# Altium PCB PcbPanel.PcbDoc
Units mm, origin at the board's own origin, x right, y up, seen from the top; angles counter-clockwise.
Board outline 198 x 105.6 mm, 2 copper layers (Top Layer, Bottom Layer), stack 1.092 mm thick; 6 components, 178 nets, 10 pads, 0 vias.
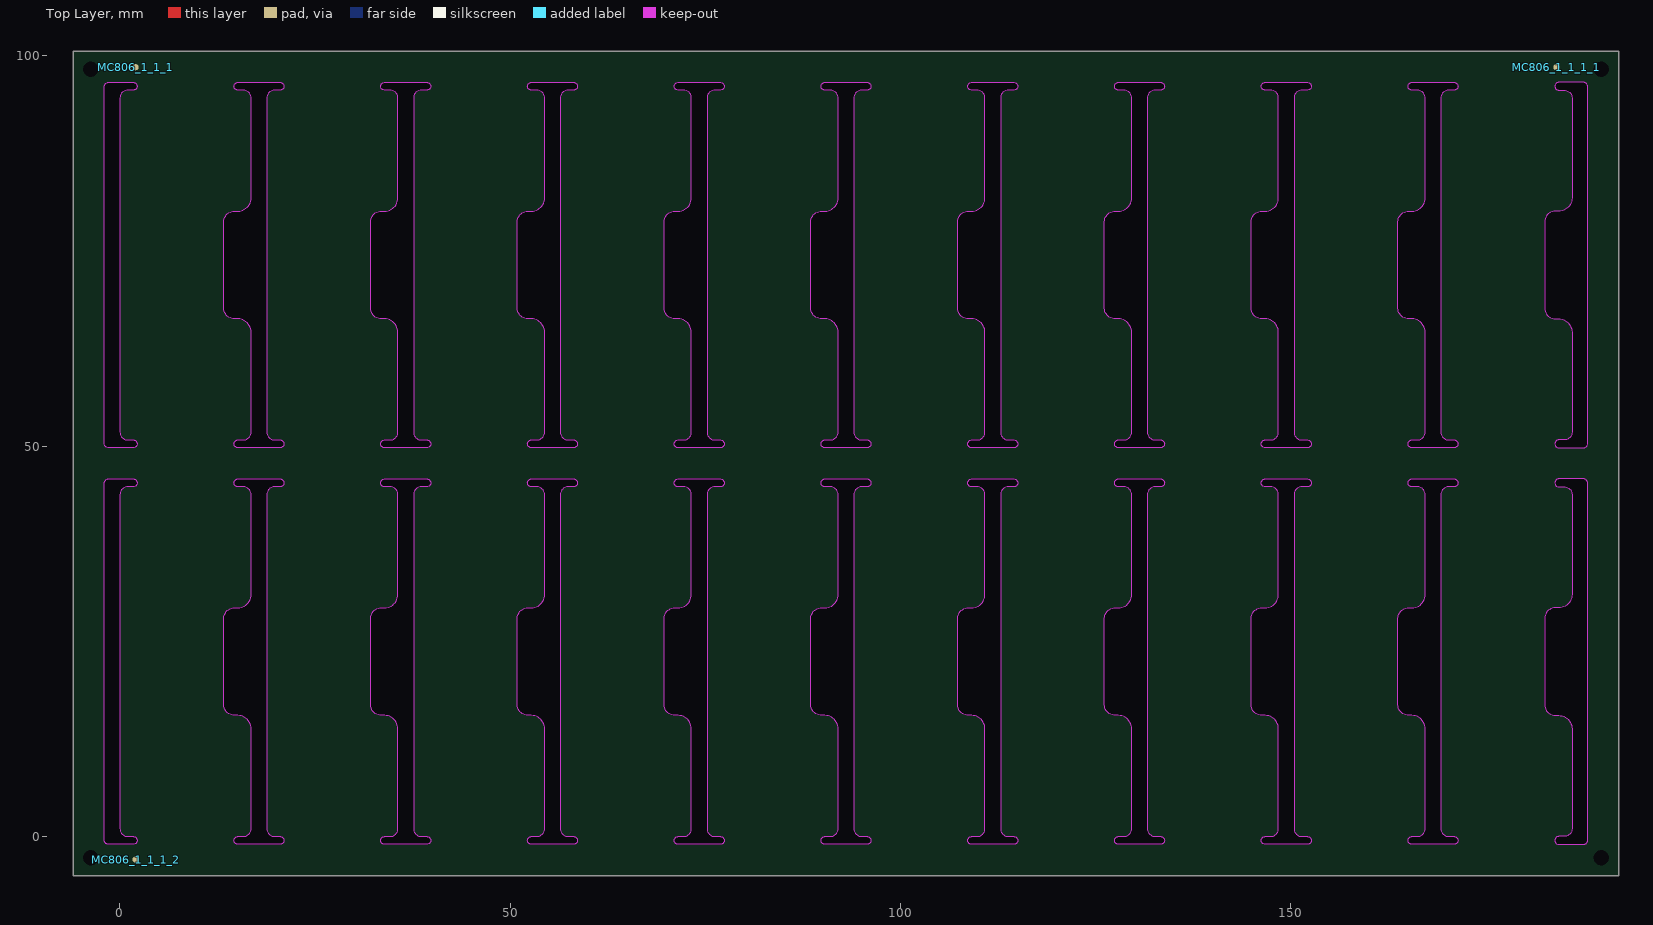
[diagram p0: Top Layer view]
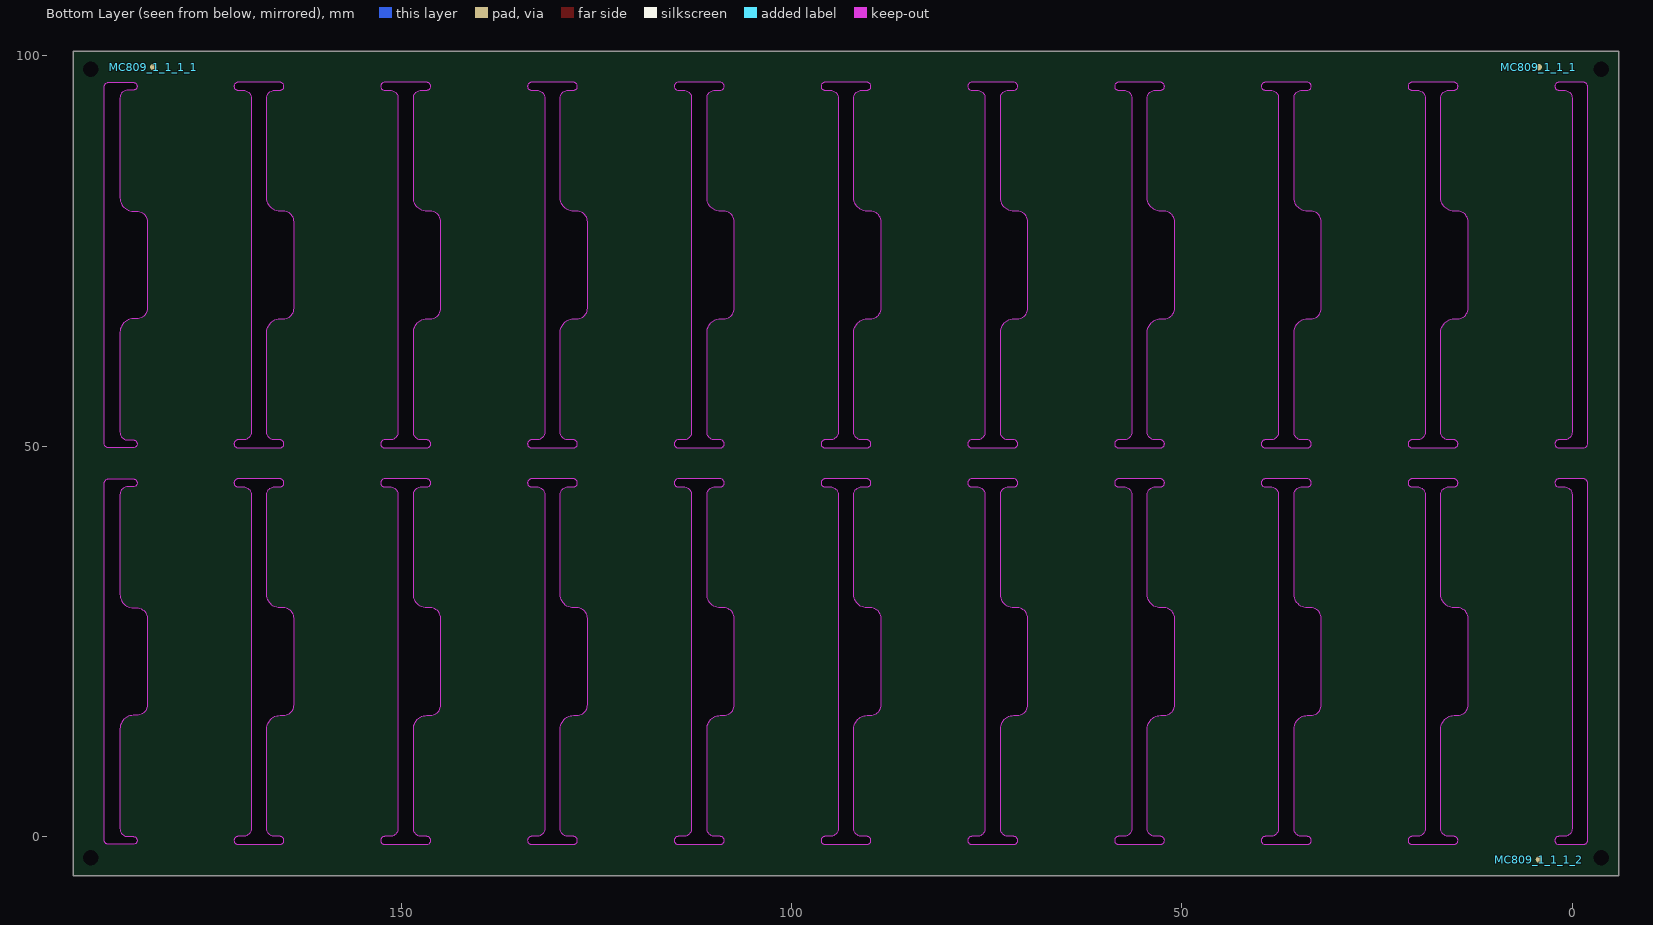
[diagram p1: Bottom Layer view, seen from below]

## Layer stack, top to bottom
Top Solder: solder mask 0.0102, SM-001, Dk 4
Top Layer: signal copper 0.0356
Dielectric 1: prepreg 0.2104, PP-017, Dk 4.3
Dielectric 3: core 0.6, Core-039, Dk 4.8
Dielectric 5: prepreg 0.2104, PP-017, Dk 4.3
Bottom Layer: signal copper 0.0356
Bottom Solder: solder mask 0.0102, SM-001, Dk 4

## Board outline
-6,-5 -6,100.6 192,100.6 192,-5
cut-out: 127.4,50.3 cw(c127.9,50.3) 127.9,50.8 128.6,50.8 ccw(c128.6,51.8) 129.6,51.8 129.6,64.6 ccw(c127.892,64.6) 127.892,66.308 127.464,66.308 cw(c127.464,67.67) 126.101,67.67 126.1,67.67 126.101,78.73 cw(c127.464,78.73) 127.464,80.092 127.892,80.092 ccw(c127.892,81.8) 129.6,81.8 129.6,94.6 ccw(c128.6,94.6) 128.6,95.6 127.9,95.6 cw(c127.9,96.1) 127.4,96.1 cw(c127.9,96.1) 127.9,96.6 133.3,96.6 cw(c133.3,96.1) 133.8,96.1 cw(c133.3,96.1) 133.3,95.6 132.6,95.6 ccw(c132.6,94.6) 131.6,94.6 131.6,51.8 ccw(c132.6,51.8) 132.6,50.8 133.3,50.8 cw(c133.3,50.3) 133.8,50.3 cw(c133.3,50.3) 133.3,49.8 127.9,49.8 cw(c127.9,50.3)
cut-out: 108.6,50.3 cw(c109.1,50.3) 109.1,50.8 109.8,50.8 ccw(c109.8,51.8) 110.8,51.8 110.8,64.6 ccw(c109.092,64.6) 109.092,66.308 108.664,66.308 cw(c108.664,67.67) 107.301,67.67 107.3,67.67 107.301,78.73 cw(c108.664,78.73) 108.664,80.092 109.092,80.092 ccw(c109.092,81.8) 110.8,81.8 110.8,94.6 ccw(c109.8,94.6) 109.8,95.6 109.1,95.6 cw(c109.1,96.1) 108.6,96.1 cw(c109.1,96.1) 109.1,96.6 114.5,96.6 cw(c114.5,96.1) 115,96.1 cw(c114.5,96.1) 114.5,95.6 113.8,95.6 ccw(c113.8,94.6) 112.8,94.6 112.8,51.8 ccw(c113.8,51.8) 113.8,50.8 114.5,50.8 cw(c114.5,50.3) 115,50.3 cw(c114.5,50.3) 114.5,49.8 109.1,49.8 cw(c109.1,50.3)
cut-out: 89.8,50.3 cw(c90.3,50.3) 90.3,50.8 91,50.8 ccw(c91,51.8) 92,51.8 92,64.6 ccw(c90.292,64.6) 90.292,66.308 89.864,66.308 cw(c89.864,67.67) 88.501,67.67 88.5,67.67 88.501,78.73 cw(c89.864,78.73) 89.864,80.092 90.292,80.092 ccw(c90.292,81.8) 92,81.8 92,94.6 ccw(c91,94.6) 91,95.6 90.3,95.6 cw(c90.3,96.1) 89.8,96.1 cw(c90.3,96.1) 90.3,96.6 95.7,96.6 cw(c95.7,96.1) 96.2,96.1 cw(c95.7,96.1) 95.7,95.6 95,95.6 ccw(c95,94.6) 94,94.6 94,51.8 ccw(c95,51.8) 95,50.8 95.7,50.8 cw(c95.7,50.3) 96.2,50.3 cw(c95.7,50.3) 95.7,49.8 90.3,49.8 cw(c90.3,50.3)
cut-out: 183.864,66.308 184.292,66.308 cw(c184.292,64.6) 186,64.6 186,51.8 cw(c185,51.8) 185,50.8 184.3,50.8 ccw(c184.3,50.3) 183.8,50.3 ccw(c184.3,50.3) 184.3,49.8 187.5,49.8 ccw(c187.5,50.3) 188,50.3 188,96.1 ccw(c187.5,96.1) 187.5,96.6 184.3,96.6 ccw(c184.3,96.1) 183.8,96.1 ccw(c184.3,96.1) 184.3,95.6 185,95.6 cw(c185,94.6) 186,94.6 186,81.8 cw(c184.292,81.8) 184.292,80.092 183.864,80.092 ccw(c183.864,78.73) 182.501,78.73 182.5,67.67 182.501,67.67 ccw(c183.864,67.67)
cut-out: 71,50.3 cw(c71.5,50.3) 71.5,50.8 72.2,50.8 ccw(c72.2,51.8) 73.2,51.8 73.2,64.6 ccw(c71.492,64.6) 71.492,66.308 71.064,66.308 cw(c71.064,67.67) 69.701,67.67 69.7,67.67 69.701,78.73 cw(c71.064,78.73) 71.064,80.092 71.492,80.092 ccw(c71.492,81.8) 73.2,81.8 73.2,94.6 ccw(c72.2,94.6) 72.2,95.6 71.5,95.6 cw(c71.5,96.1) 71,96.1 cw(c71.5,96.1) 71.5,96.6 76.9,96.6 cw(c76.9,96.1) 77.4,96.1 cw(c76.9,96.1) 76.9,95.6 76.2,95.6 ccw(c76.2,94.6) 75.2,94.6 75.2,51.8 ccw(c76.2,51.8) 76.2,50.8 76.9,50.8 cw(c76.9,50.3) 77.4,50.3 cw(c76.9,50.3) 76.9,49.8 71.5,49.8 cw(c71.5,50.3)
cut-out: 52.2,50.3 cw(c52.7,50.3) 52.7,50.8 53.4,50.8 ccw(c53.4,51.8) 54.4,51.8 54.4,64.6 ccw(c52.692,64.6) 52.692,66.308 52.264,66.308 cw(c52.264,67.67) 50.901,67.67 50.9,67.67 50.901,78.73 cw(c52.264,78.73) 52.264,80.092 52.692,80.092 ccw(c52.692,81.8) 54.4,81.8 54.4,94.6 ccw(c53.4,94.6) 53.4,95.6 52.7,95.6 cw(c52.7,96.1) 52.2,96.1 cw(c52.7,96.1) 52.7,96.6 58.1,96.6 cw(c58.1,96.1) 58.6,96.1 cw(c58.1,96.1) 58.1,95.6 57.4,95.6 ccw(c57.4,94.6) 56.4,94.6 56.4,51.8 ccw(c57.4,51.8) 57.4,50.8 58.1,50.8 cw(c58.1,50.3) 58.6,50.3 cw(c58.1,50.3) 58.1,49.8 52.7,49.8 cw(c52.7,50.3)
cut-out: 14.6,50.3 cw(c15.1,50.3) 15.1,50.8 15.8,50.8 ccw(c15.8,51.8) 16.8,51.8 16.8,64.6 ccw(c15.092,64.6) 15.092,66.308 14.664,66.308 cw(c14.664,67.67) 13.301,67.67 13.3,67.67 13.301,78.73 cw(c14.664,78.73) 14.664,80.092 15.092,80.092 ccw(c15.092,81.8) 16.8,81.8 16.8,94.6 ccw(c15.8,94.6) 15.8,95.6 15.1,95.6 cw(c15.1,96.1) 14.6,96.1 cw(c15.1,96.1) 15.1,96.6 20.5,96.6 cw(c20.5,96.1) 21,96.1 cw(c20.5,96.1) 20.5,95.6 19.8,95.6 ccw(c19.8,94.6) 18.8,94.6 18.8,51.8 ccw(c19.8,51.8) 19.8,50.8 20.5,50.8 cw(c20.5,50.3) 21,50.3 cw(c20.5,50.3) 20.5,49.8 15.1,49.8 cw(c15.1,50.3)
cut-out: 33.4,50.3 cw(c33.9,50.3) 33.9,50.8 34.6,50.8 ccw(c34.6,51.8) 35.6,51.8 35.6,64.6 ccw(c33.892,64.6) 33.892,66.308 33.464,66.308 cw(c33.464,67.67) 32.101,67.67 32.1,67.67 32.101,78.73 cw(c33.464,78.73) 33.464,80.092 33.892,80.092 ccw(c33.892,81.8) 35.6,81.8 35.6,94.6 ccw(c34.6,94.6) 34.6,95.6 33.9,95.6 cw(c33.9,96.1) 33.4,96.1 cw(c33.9,96.1) 33.9,96.6 39.3,96.6 cw(c39.3,96.1) 39.8,96.1 cw(c39.3,96.1) 39.3,95.6 38.6,95.6 ccw(c38.6,94.6) 37.6,94.6 37.6,51.8 ccw(c38.6,51.8) 38.6,50.8 39.3,50.8 cw(c39.3,50.3) 39.8,50.3 cw(c39.3,50.3) 39.3,49.8 33.9,49.8 cw(c33.9,50.3)
cut-out: 165,50.3 cw(c165.5,50.3) 165.5,50.8 166.2,50.8 ccw(c166.2,51.8) 167.2,51.8 167.2,64.6 ccw(c165.492,64.6) 165.492,66.308 165.064,66.308 cw(c165.064,67.67) 163.701,67.67 163.7,67.67 163.701,78.73 cw(c165.064,78.73) 165.064,80.092 165.492,80.092 ccw(c165.492,81.8) 167.2,81.8 167.2,94.6 ccw(c166.2,94.6) 166.2,95.6 165.5,95.6 cw(c165.5,96.1) 165,96.1 cw(c165.5,96.1) 165.5,96.6 170.9,96.6 cw(c170.9,96.1) 171.4,96.1 cw(c170.9,96.1) 170.9,95.6 170.2,95.6 ccw(c170.2,94.6) 169.2,94.6 169.2,51.8 ccw(c170.2,51.8) 170.2,50.8 170.9,50.8 cw(c170.9,50.3) 171.4,50.3 cw(c170.9,50.3) 170.9,49.8 165.5,49.8 cw(c165.5,50.3)
cut-out: 146.2,50.3 cw(c146.7,50.3) 146.7,50.8 147.4,50.8 ccw(c147.4,51.8) 148.4,51.8 148.4,64.6 ccw(c146.692,64.6) 146.692,66.308 146.264,66.308 cw(c146.264,67.67) 144.901,67.67 144.9,67.67 144.901,78.73 cw(c146.264,78.73) 146.264,80.092 146.692,80.092 ccw(c146.692,81.8) 148.4,81.8 148.4,94.6 ccw(c147.4,94.6) 147.4,95.6 146.7,95.6 cw(c146.7,96.1) 146.2,96.1 cw(c146.7,96.1) 146.7,96.6 152.1,96.6 cw(c152.1,96.1) 152.6,96.1 cw(c152.1,96.1) 152.1,95.6 151.4,95.6 ccw(c151.4,94.6) 150.4,94.6 150.4,51.8 ccw(c151.4,51.8) 151.4,50.8 152.1,50.8 cw(c152.1,50.3) 152.6,50.3 cw(c152.1,50.3) 152.1,49.8 146.7,49.8 cw(c146.7,50.3)
cut-out: -2,50.3 -2,96.1 cw(c-1.5,96.1) -1.5,96.6 1.7,96.6 cw(c1.7,96.1) 2.2,96.1 cw(c1.7,96.1) 1.7,95.6 1,95.6 ccw(c1,94.6) 0,94.6 0,51.8 ccw(c1,51.8) 1,50.8 1.7,50.8 cw(c1.7,50.3) 2.2,50.3 cw(c1.7,50.3) 1.7,49.8 -1.5,49.8 cw(c-1.5,50.3)
cut-out: 183.864,15.508 184.292,15.508 cw(c184.292,13.8) 186,13.8 186,1 cw(c185,1) 185,0 184.3,0 ccw(c184.3,-0.5) 183.8,-0.5 ccw(c184.3,-0.5) 184.3,-1 187.5,-1 ccw(c187.5,-0.5) 188,-0.5 188,45.3 ccw(c187.5,45.3) 187.5,45.8 184.3,45.8 ccw(c184.3,45.3) 183.8,45.3 ccw(c184.3,45.3) 184.3,44.8 185,44.8 cw(c185,43.8) 186,43.8 186,31 cw(c184.292,31) 184.292,29.292 183.864,29.292 ccw(c183.864,27.93) 182.501,27.93 182.5,16.87 182.501,16.87 ccw(c183.864,16.87)
cut-out: 165,-0.5 cw(c165.5,-0.5) 165.5,0 166.2,0 ccw(c166.2,1) 167.2,1 167.2,13.8 ccw(c165.492,13.8) 165.492,15.508 165.064,15.508 cw(c165.064,16.87) 163.701,16.87 163.7,16.87 163.701,27.93 cw(c165.064,27.93) 165.064,29.292 165.492,29.292 ccw(c165.492,31) 167.2,31 167.2,43.8 ccw(c166.2,43.8) 166.2,44.8 165.5,44.8 cw(c165.5,45.3) 165,45.3 cw(c165.5,45.3) 165.5,45.8 170.9,45.8 cw(c170.9,45.3) 171.4,45.3 cw(c170.9,45.3) 170.9,44.8 170.2,44.8 ccw(c170.2,43.8) 169.2,43.8 169.2,1 ccw(c170.2,1) 170.2,0 170.9,0 cw(c170.9,-0.5) 171.4,-0.5 cw(c170.9,-0.5) 170.9,-1 165.5,-1 cw(c165.5,-0.5)
cut-out: 146.2,-0.5 cw(c146.7,-0.5) 146.7,0 147.4,0 ccw(c147.4,1) 148.4,1 148.4,13.8 ccw(c146.692,13.8) 146.692,15.508 146.264,15.508 cw(c146.264,16.87) 144.901,16.87 144.9,16.87 144.901,27.93 cw(c146.264,27.93) 146.264,29.292 146.692,29.292 ccw(c146.692,31) 148.4,31 148.4,43.8 ccw(c147.4,43.8) 147.4,44.8 146.7,44.8 cw(c146.7,45.3) 146.2,45.3 cw(c146.7,45.3) 146.7,45.8 152.1,45.8 cw(c152.1,45.3) 152.6,45.3 cw(c152.1,45.3) 152.1,44.8 151.4,44.8 ccw(c151.4,43.8) 150.4,43.8 150.4,1 ccw(c151.4,1) 151.4,0 152.1,0 cw(c152.1,-0.5) 152.6,-0.5 cw(c152.1,-0.5) 152.1,-1 146.7,-1 cw(c146.7,-0.5)
cut-out: 127.4,-0.5 cw(c127.9,-0.5) 127.9,0 128.6,0 ccw(c128.6,1) 129.6,1 129.6,13.8 ccw(c127.892,13.8) 127.892,15.508 127.464,15.508 cw(c127.464,16.87) 126.101,16.87 126.1,16.87 126.101,27.93 cw(c127.464,27.93) 127.464,29.292 127.892,29.292 ccw(c127.892,31) 129.6,31 129.6,43.8 ccw(c128.6,43.8) 128.6,44.8 127.9,44.8 cw(c127.9,45.3) 127.4,45.3 cw(c127.9,45.3) 127.9,45.8 133.3,45.8 cw(c133.3,45.3) 133.8,45.3 cw(c133.3,45.3) 133.3,44.8 132.6,44.8 ccw(c132.6,43.8) 131.6,43.8 131.6,1 ccw(c132.6,1) 132.6,0 133.3,0 cw(c133.3,-0.5) 133.8,-0.5 cw(c133.3,-0.5) 133.3,-1 127.9,-1 cw(c127.9,-0.5)
cut-out: 108.6,-0.5 cw(c109.1,-0.5) 109.1,0 109.8,0 ccw(c109.8,1) 110.8,1 110.8,13.8 ccw(c109.092,13.8) 109.092,15.508 108.664,15.508 cw(c108.664,16.87) 107.301,16.87 107.3,16.87 107.301,27.93 cw(c108.664,27.93) 108.664,29.292 109.092,29.292 ccw(c109.092,31) 110.8,31 110.8,43.8 ccw(c109.8,43.8) 109.8,44.8 109.1,44.8 cw(c109.1,45.3) 108.6,45.3 cw(c109.1,45.3) 109.1,45.8 114.5,45.8 cw(c114.5,45.3) 115,45.3 cw(c114.5,45.3) 114.5,44.8 113.8,44.8 ccw(c113.8,43.8) 112.8,43.8 112.8,1 ccw(c113.8,1) 113.8,0 114.5,0 cw(c114.5,-0.5) 115,-0.5 cw(c114.5,-0.5) 114.5,-1 109.1,-1 cw(c109.1,-0.5)
cut-out: 89.8,-0.5 cw(c90.3,-0.5) 90.3,0 91,0 ccw(c91,1) 92,1 92,13.8 ccw(c90.292,13.8) 90.292,15.508 89.864,15.508 cw(c89.864,16.87) 88.501,16.87 88.5,16.87 88.501,27.93 cw(c89.864,27.93) 89.864,29.292 90.292,29.292 ccw(c90.292,31) 92,31 92,43.8 ccw(c91,43.8) 91,44.8 90.3,44.8 cw(c90.3,45.3) 89.8,45.3 cw(c90.3,45.3) 90.3,45.8 95.7,45.8 cw(c95.7,45.3) 96.2,45.3 cw(c95.7,45.3) 95.7,44.8 95,44.8 ccw(c95,43.8) 94,43.8 94,1 ccw(c95,1) 95,0 95.7,0 cw(c95.7,-0.5) 96.2,-0.5 cw(c95.7,-0.5) 95.7,-1 90.3,-1 cw(c90.3,-0.5)
cut-out: 71,-0.5 cw(c71.5,-0.5) 71.5,0 72.2,0 ccw(c72.2,1) 73.2,1 73.2,13.8 ccw(c71.492,13.8) 71.492,15.508 71.064,15.508 cw(c71.064,16.87) 69.701,16.87 69.7,16.87 69.701,27.93 cw(c71.064,27.93) 71.064,29.292 71.492,29.292 ccw(c71.492,31) 73.2,31 73.2,43.8 ccw(c72.2,43.8) 72.2,44.8 71.5,44.8 cw(c71.5,45.3) 71,45.3 cw(c71.5,45.3) 71.5,45.8 76.9,45.8 cw(c76.9,45.3) 77.4,45.3 cw(c76.9,45.3) 76.9,44.8 76.2,44.8 ccw(c76.2,43.8) 75.2,43.8 75.2,1 ccw(c76.2,1) 76.2,0 76.9,0 cw(c76.9,-0.5) 77.4,-0.5 cw(c76.9,-0.5) 76.9,-1 71.5,-1 cw(c71.5,-0.5)
cut-out: 52.2,-0.5 cw(c52.7,-0.5) 52.7,0 53.4,0 ccw(c53.4,1) 54.4,1 54.4,13.8 ccw(c52.692,13.8) 52.692,15.508 52.264,15.508 cw(c52.264,16.87) 50.901,16.87 50.9,16.87 50.901,27.93 cw(c52.264,27.93) 52.264,29.292 52.692,29.292 ccw(c52.692,31) 54.4,31 54.4,43.8 ccw(c53.4,43.8) 53.4,44.8 52.7,44.8 cw(c52.7,45.3) 52.2,45.3 cw(c52.7,45.3) 52.7,45.8 58.1,45.8 cw(c58.1,45.3) 58.6,45.3 cw(c58.1,45.3) 58.1,44.8 57.4,44.8 ccw(c57.4,43.8) 56.4,43.8 56.4,1 ccw(c57.4,1) 57.4,0 58.1,0 cw(c58.1,-0.5) 58.6,-0.5 cw(c58.1,-0.5) 58.1,-1 52.7,-1 cw(c52.7,-0.5)
cut-out: 33.4,-0.5 cw(c33.9,-0.5) 33.9,0 34.6,0 ccw(c34.6,1) 35.6,1 35.6,13.8 ccw(c33.892,13.8) 33.892,15.508 33.464,15.508 cw(c33.464,16.87) 32.101,16.87 32.1,16.87 32.101,27.93 cw(c33.464,27.93) 33.464,29.292 33.892,29.292 ccw(c33.892,31) 35.6,31 35.6,43.8 ccw(c34.6,43.8) 34.6,44.8 33.9,44.8 cw(c33.9,45.3) 33.4,45.3 cw(c33.9,45.3) 33.9,45.8 39.3,45.8 cw(c39.3,45.3) 39.8,45.3 cw(c39.3,45.3) 39.3,44.8 38.6,44.8 ccw(c38.6,43.8) 37.6,43.8 37.6,1 ccw(c38.6,1) 38.6,0 39.3,0 cw(c39.3,-0.5) 39.8,-0.5 cw(c39.3,-0.5) 39.3,-1 33.9,-1 cw(c33.9,-0.5)
cut-out: 14.6,-0.5 cw(c15.1,-0.5) 15.1,0 15.8,0 ccw(c15.8,1) 16.8,1 16.8,13.8 ccw(c15.092,13.8) 15.092,15.508 14.664,15.508 cw(c14.664,16.87) 13.301,16.87 13.3,16.87 13.301,27.93 cw(c14.664,27.93) 14.664,29.292 15.092,29.292 ccw(c15.092,31) 16.8,31 16.8,43.8 ccw(c15.8,43.8) 15.8,44.8 15.1,44.8 cw(c15.1,45.3) 14.6,45.3 cw(c15.1,45.3) 15.1,45.8 20.5,45.8 cw(c20.5,45.3) 21,45.3 cw(c20.5,45.3) 20.5,44.8 19.8,44.8 ccw(c19.8,43.8) 18.8,43.8 18.8,1 ccw(c19.8,1) 19.8,0 20.5,0 cw(c20.5,-0.5) 21,-0.5 cw(c20.5,-0.5) 20.5,-1 15.1,-1 cw(c15.1,-0.5)
cut-out: -2,-0.5 -2,45.3 cw(c-1.5,45.3) -1.5,45.8 1.7,45.8 cw(c1.7,45.3) 2.2,45.3 cw(c1.7,45.3) 1.7,44.8 1,44.8 ccw(c1,43.8) 0,43.8 0,1 ccw(c1,1) 1,0 1.7,0 cw(c1.7,-0.5) 2.2,-0.5 cw(c1.7,-0.5) 1.7,-1 -1.5,-1 cw(c-1.5,-0.5)

## Design rules (kind name [scope] priority, off if disabled: settings)
AssemblyTestPointUsage [All] p1: valid=2
AssemblyTestpoint [(IsPad And (OnTopLayer Or OnBottomLayer))] p1: testpointundercomponent=FALSE minsize=1.016 maxsize=2.54 preferedsize=1.524 minholesize=0 maxholesize=1.016 preferedholesize=0.813 testpointgrid=0.025 usegrid=TRUE gridtolerance=0 allowsidebottom=TRUE
BoardOutlineClearance [All] p1: gap=0.1 ignorepadtopadclearanceinfootprint=FALSE
Clearance [All] p1: gap=0.14 ignorepadtopadclearanceinfootprint=FALSE
ComponentClearance [All] p1 off: gap=0.254 collisioncheckmode=3 verticalgap=0.254 showdistances=FALSE
DiffPairsRouting [All] p1: maxlimit=0.254 minlimit=0.15 mostfreqgap=0.254 toplayer_minwidth=0.14 toplayer_maxwidth=0.381 toplayer_prefwidth=0.2 bottomlayer_minwidth=0.14 bottomlayer_maxwidth=0.381 bottomlayer_prefwidth=0.2 maxuncoupledlength=12.7
Height [All] p1: minheight=0 maxheight=100.4 prefheight=12.7
HoleSize [All] p1: absolutevalues=TRUE maxlimit=10 minlimit=0.127 maxpercent=80.000 minpercent=20.000
HoleToHoleClearance [All] p1: gap=0.241 allowstackedmicrovias=TRUE
MinimumAnnularRing [All] p1: minimumring=0.051
MinimumSolderMaskSliver [All] p1: minsoldermaskwidth=0.05
PasteMaskExpansion [All] p1: expansion=-0.05
PolygonConnect PWR [InNetClass('PWR') vs InNetClass('PWR')] p1: connectstyle=Direct reliefconductorwidth=0.254 reliefentries=4 polygonreliefangle="90 Angle" airgapwidth=0.254
PolygonConnect RF_GND [InNamedPolygon('GND_BOTTOM_RF')] p2: thpad.connectstyle=Relief thpad.reliefconductorwidth=0.254 thpad.reliefentries=4 thpad.polygonreliefangle="90 Angle" thpad.airgapwidth=0.1 smdpad.connectstyle=Relief smdpad.reliefconductorwidth=0.254 smdpad.reliefentries=4 smdpad.polygonreliefangle="90 Angle" smdpad.airgapwidth=0.1 via.connectstyle=Direct via.reliefconductorwidth=0.254 via.reliefentries=4 via.polygonreliefangle="90 Angle" via.airgapwidth=0.254
PolygonConnect GND [InNet('GND')] p3: thpad.connectstyle=Relief thpad.reliefconductorwidth=0.254 thpad.reliefentries=4 thpad.polygonreliefangle="90 Angle" thpad.airgapwidth=0.254 smdpad.connectstyle=Relief smdpad.reliefconductorwidth=0.254 smdpad.reliefentries=4 smdpad.polygonreliefangle="90 Angle" smdpad.airgapwidth=0.254 via.connectstyle=Direct via.reliefconductorwidth=0.254 via.reliefentries=4 via.polygonreliefangle="90 Angle" via.airgapwidth=0.254
PolygonConnect [All] p4: connectstyle=Direct reliefconductorwidth=0.254 reliefentries=4 polygonreliefangle="90 Angle" airgapwidth=0.254
RoutingVias [All] p1: holewidth=0.15 width=0.35 viastyle="Through Hole" minholewidth=0.127 minwidth=0.25 maxholewidth=0.6 maxwidth=1
SilkToSilkClearance [All] p1: silktosilkclearance=0.05
SilkToSolderMaskClearance [IsPad] p1: minsilkscreentomaskgap=0.05 clearancetoexposedcopper=TRUE
SolderMaskExpansion SolderMaskExpansion_via [IsVia] p1: expansion=0.102 istentingtop=TRUE
SolderMaskExpansion [All] p2: expansion=0.025 istentingtop=FALSE
UnRoutedNet [All] p1: checkbadconnections=TRUE
ViasUnderSMD [All] p1: allowed=TRUE
Width RF [InNetClass('RF')] p1: maxlimit=0.762 minlimit=0.154 preferedwidth=0.236 minimp=50.000000 maximp=50.000000 favimp=50.000000
Width [All] p2: maxlimit=30 minlimit=0.122 preferedwidth=0.2
18 further rules are at their usual default settings.

## Classes and differential pairs
net class RF: RF1 RF2 RF3
component class U_LED: Q14 TP1 TP31 U20
component class PABoostConverter: TP14 TP15 TP16
net class PWR: 3V0 5V0 PA_GATE_SWITCH PA_I_DIFF_N PA_I_DIFF_P PA_PRE_L PA_PST_L PABOOST_SW V_LOAD V_PA V_SYS

## Components (designator, comment, footprint, x,y, rotation, side; value= is the part's Value field where it differs from the comment)
MC806_1_1_1 "Mire_CMS" CMSMires 2,98.55 r90 top (schematic designator MC804)
MC806_1_1_1_1 "Mire_CMS" CMSMires 184,98.55 r90 top (schematic designator MC804)
MC806_1_1_1_2 "Mire_CMS" CMSMires 2,-2.95 r270 top (schematic designator MC804)
MC809_1_1_1 "Mire_CMS" CMSMires 4.25,98.55 r90 bottom (schematic designator MC804)
MC809_1_1_1_1 "Mire_CMS" CMSMires 181.75,98.55 r90 bottom (schematic designator MC804)
MC809_1_1_1_2 "Mire_CMS" CMSMires 4.25,-2.95 r270 bottom (schematic designator MC804)

## Footprints (in the part's own frame and the unit in brackets; to place one, negate y for a bottom-side part, rotate by r counter-clockwise, add the part's x,y. Pads: shape width x height; smd on the part's side, far side on the other; paste and mask are expansions set on the pad)
CMSMires [mm]
  round 0.8 smd paste-0.5 mask+0.2: 1(0,0)

## Part data
MC806_1_1_1 MC806_1_1_1_1 MC806_1_1_1_2 MC809_1_1_1 MC809_1_1_1_1 MC809_1_1_1_2: library part CMSMire, "Mire CMS", FAB=MaScir, REF_FAB=MC1

## Free pads (board coordinates)
  round 0 hole 2 unplated: ""(-3.75,98.3) ""(-3.75,-2.7) ""(189.75,-2.7) ""(189.75,98.3)

## Nets (pads, with @x,y where several pads share a name; then routed paths per layer and width w, separated by ;. In a path a pad name is that pad's centre, name@x,y a point inside that pad or via, vN(x,y) a via of type N, cw(c..) or ccw(c..) an arc to the next point about the centre after c; other vN are vias at no path point)
3V0: 
5V0: 
5V0_FB_AuC: 
5V0BOOST_SW: 
ADC_C\S\_uC: 
ADC_DIN_uC: 
ADC_DOUT_uC: 
ADC_SCLK_uC: 
BAT_NTC: 
Battery_Indicators_LED1: 
Battery_Indicators_LED2: 
Battery_LED1: 
Battery_LED2: 
Battery_LED3: 
Battery_LED4: 
BOOST_FB: 
BTN1: 
BTN1_uC: 
BTN2: 
BTN2_uC: 
CAP1: 
CAP1_uC: 
CAP2: 
CAP2_uC: 
CAP3: 
CAP3_uC: 
CAP4: 
CAP4_uC: 
CAP5: 
CAP5_uC: 
CAP6: 
CAP6_uC: 
CHG_BTST: 
CHG_ILIM: 
CHG_PMIP: 
CHG_QON: 
CHG_REGN: 
CHG_SW: 
CHG_TS_BIAS: 
Continuous_LED1: 
Continuous_LED2: 
DCC: 
DEC1: 
DEC3: 
DEC4_6: 
DEC5: 
Fluid_Indicators_LED1: 
Fluid_Indicators_LED2: 
GND: 
ILOAD: 
Intermittant_LED1: 
Intermittant_LED2: 
LED_SCL: 
LED_SDA: 
Neb_Indicators_LED1: 
Neb_Indicators_LED2: 
NetC200_2: 
NetC202_1: 
NetC216_1: 
NetC218_1: 
NetC219_1: 
NetC220_1: 
NetC222_1: 
NetC223_1: 
NetC225_2: 
NetC226_2: 
NetC407_2: 
NetC413_2: 
NetC500_1: 
NetC500_2: 
NetC501_2: 
NetC502_2: 
NetC503_1: 
NetC503_2: 
NetC504_1: 
NetC504_2: 
NetC700_2: 
NetC713_2: 
NetC903_2: 
NetC908_1: 
NetC919_1: 
NetJ700_1: 
NetJ700_2: 
NetL800_1: 
NetQ200_1: 
NetQ201_1: 
NetQ202_1: 
NetQ203_1: 
NetQ204_1: 
NetQ205_1: 
NetQ206_1: 
NetQ207_1: 
NetQ600_2: 
NetQ600_3: 
NetQ601_2: 
NetQ601_3: 
NetQ700_2: 
NetQ700_3: 
NetQ900_2: 
NetQ900_3: 
NetR209_1: 
NetR404_2: 
NetR407_2: 
NetR600_1: 
NetR602_1: 
NetR700_1: 
NetR709_1: 
NetR712_2: 
NetR713_1: 
NetR713_2: 
NetR900_1: 
NetR901_1: 
NetR904_2: 
NetR905_1: 
NetR906_2: 
NetR907_1: 
NetR915_2: 
NetTP704_TP: 
NetTP705_TP: 
NetTP706_TP: 
NetTP707_TP: 
NetTP708_TP: 
NetTP709_TP: 
NetU600_2: 
NetU600_3: 
NetU703_1: 
NetU704_1: 
NetU705_1: 
NetU800_A16: 
NetU800_B17: 
NetU800_B19: 
P0.00/XL1: 
P0.01/XL2: 
PA_GATE_HG: 
PA_GATE_LG: 
PA_GATE_SWITCH: 
PA_I_AuC: 
PA_I_DIFF_N: 
PA_I_DIFF_P: 
PA_PRE_L: 
PA_PST_L: 
PABOOST_BST: 
PABOOST_COMP: 
PABOOST_DAC_OUT: 
PABOOST_FB: 
PABOOST_SW: 
PABOOST_VCC: 
Power_Adapter_LED1: 
Power_Adapter_LED2: 
RF1: 
RF2: 
RF3: 
RST: 
RX: 
SCL_uC: 
SDA_uC: 
SUPPLY_PROT_PG_uC: 
SWDCLK: 
SWDIO: 
System_Indicators_LED1: 
System_Indicators_LED2: 
TEMP_ALERT_uC: 
TEST0: 
TEST1: 
TX: 
V_BAT: 
V_EXT: 
V_LOAD: 
V_LOAD_ENV: 
V_LOAD_ENV_FB_AuC: 
V_PA: 
V_PA_EN_uC: 
V_PA_FB_AuC: 
V_PA_IN_FB_AuC: 
V_SUPPLY: 
V_SYS: 
XC1: 
XC2: 
pads on no net: MC806_1_1_1.1 MC806_1_1_1_1.1 MC806_1_1_1_2.1 MC809_1_1_1.1 MC809_1_1_1_1.1 MC809_1_1_1_2.1

## Silkscreen, mask and mechanical layers (free items; w line width, h text height)
Dimensions:
  lines w0.127: -11.05,100.6 -6.2,100.6 ; -11.034,-5 -6.284,-5 ; -6,100.75 -6,105.5 ; 192,100.75 192,105.5
  lines w0.254: -12.667,0 -11,-5 ; -12.667,95.6 -11,100.6 ; -11.254,-5 -10.746,-5 ; -11.254,100.6 -10.746,100.6 ; -11,37.018 -11,-5 ; -11,58.582 -11,100.6 ; -9.333,0 -11,-5 ; -9.333,95.6 -11,100.6 ; -6,105.346 -6,105.854 ; -1,103.933 -6,105.6 ; -1,107.267 -6,105.6 ; 83.965,105.6 -6,105.6 ; 102.035,105.6 192,105.6 ; 187,103.933 192,105.6 ; 187,107.267 192,105.6 ; 192,105.346 192,105.854
  text "198 (mm)" at 84.219,103.661 h5
  text "105.6 (mm)" at -9.061,37.272 h5 r90
Panel Shape/ Cutout:
  drawing of 632 lines, arcs and shapes, not listed
  text "CNC" at -1.55,95.65 h0.6
  text "CNC" at 17.05,95.65 h0.6
  text "CNC" at 35.85,95.65 h0.6
  text "CNC" at 54.65,95.65 h0.6
  text "CNC" at 73.45,95.65 h0.6
  text "CNC" at 92.25,95.65 h0.6
  text "CNC" at 111.05,95.65 h0.6
  text "CNC" at 129.85,95.65 h0.6
  text "CNC" at 148.65,95.65 h0.6
  text "CNC" at 167.45,95.65 h0.6
  text "CNC" at 185.95,95.65 h0.6
  text "V-CUT" at 197.3,94.95 h1.1
  text "V-CUT" at 197.3,50.15 h1.1
  text "CNC" at -1.55,44.85 h0.6
  text "CNC" at 17.05,44.85 h0.6
  text "CNC" at 35.85,44.85 h0.6
  text "CNC" at 54.65,44.85 h0.6
  text "CNC" at 73.45,44.85 h0.6
  text "CNC" at 92.25,44.85 h0.6
  text "CNC" at 111.05,44.85 h0.6
  text "CNC" at 129.85,44.85 h0.6
  text "CNC" at 148.65,44.85 h0.6
  text "CNC" at 167.45,44.85 h0.6
  text "CNC" at 185.95,44.85 h0.6
  text "V-CUT" at 197.3,44.15 h1.1
  text "V-CUT" at 197.3,-0.65 h1.1

## Panel: embedded boards
"Pcb.PcbDoc" at 0.1,95.6, 10 rows x 1 columns, spacing 18.8 x 45.8, rotation 270
"Pcb.PcbDoc" at 0.1,44.8, 10 rows x 1 columns, spacing 18.8 x 45.8, rotation 270